# Altium PCB PCB3.PcbDoc
Units mm, origin at the board's own origin, x right, y up, seen from the top; angles counter-clockwise.
Board outline 86 x 64 mm, 2 copper layers (Top Layer, Bottom Layer); 14 components, 15 nets, 47 pads, 0 vias.
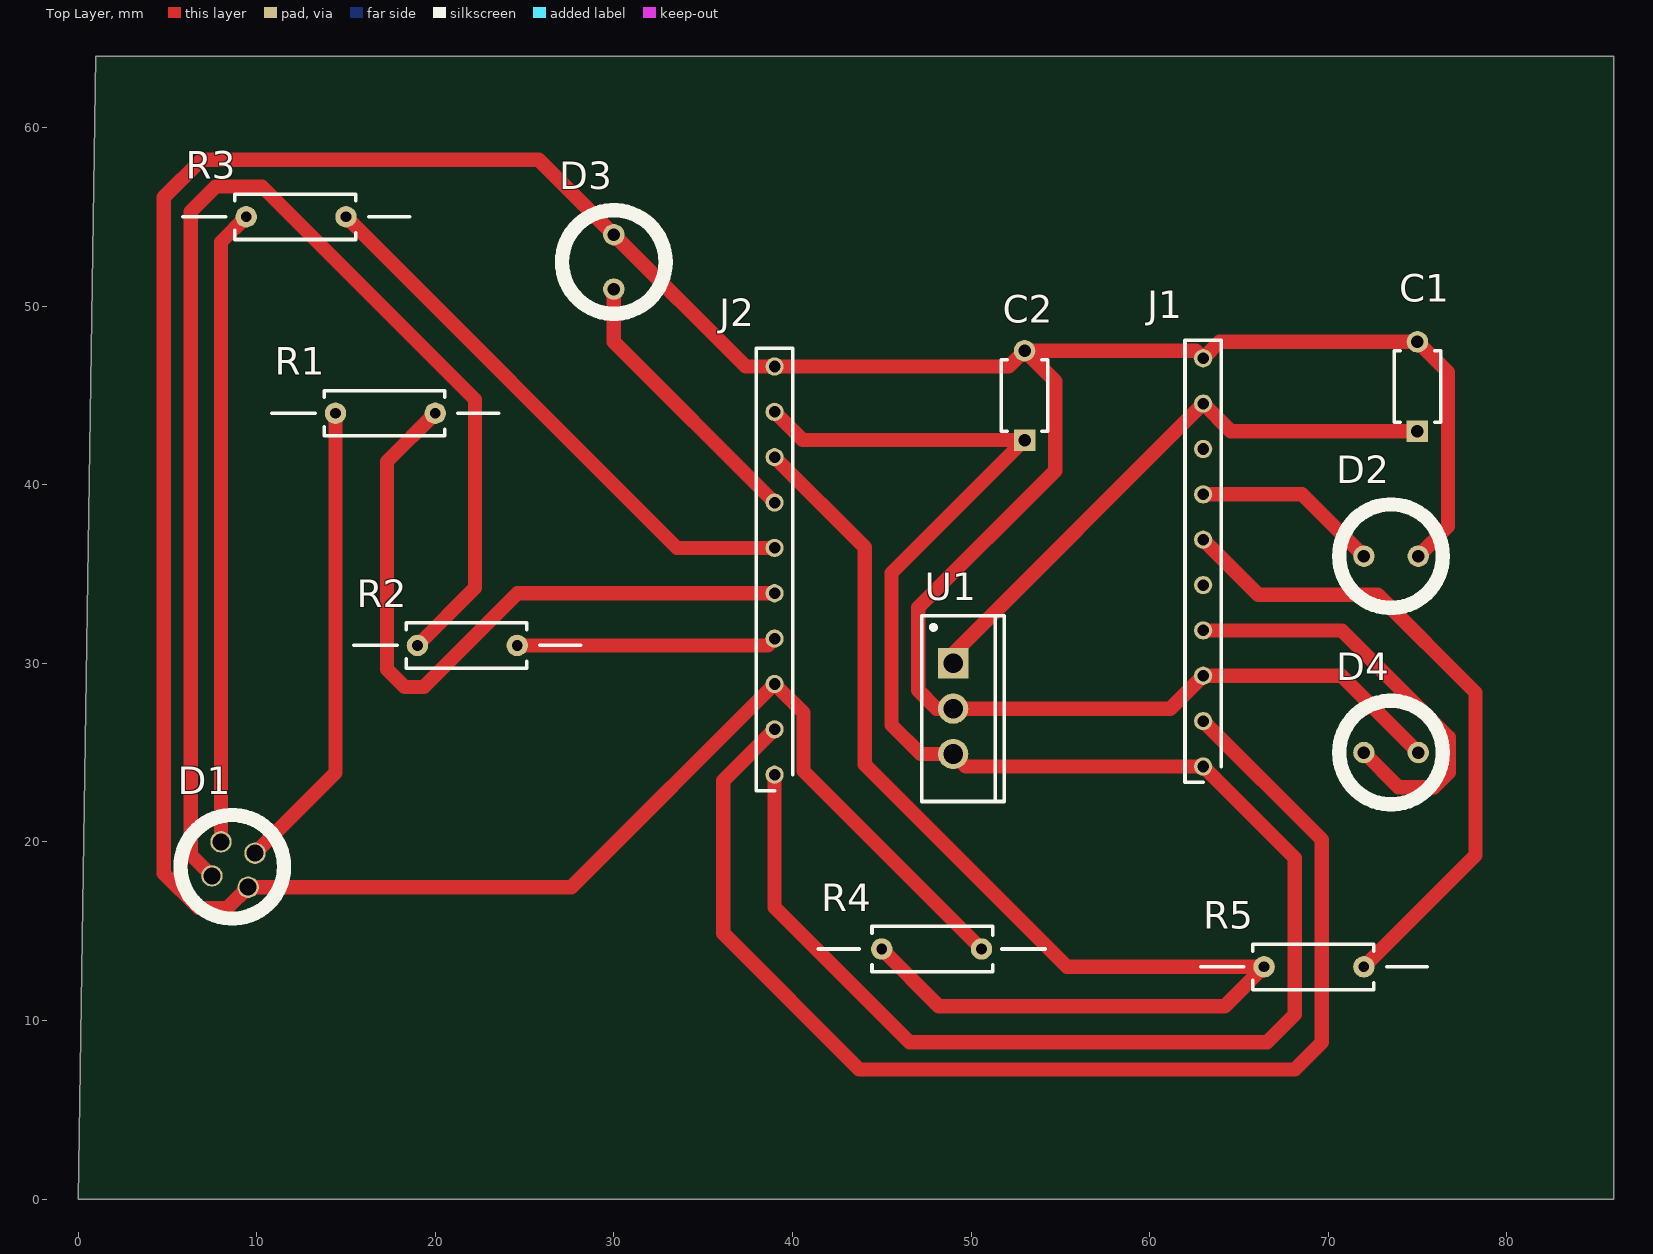
[diagram p0: Top Layer view]
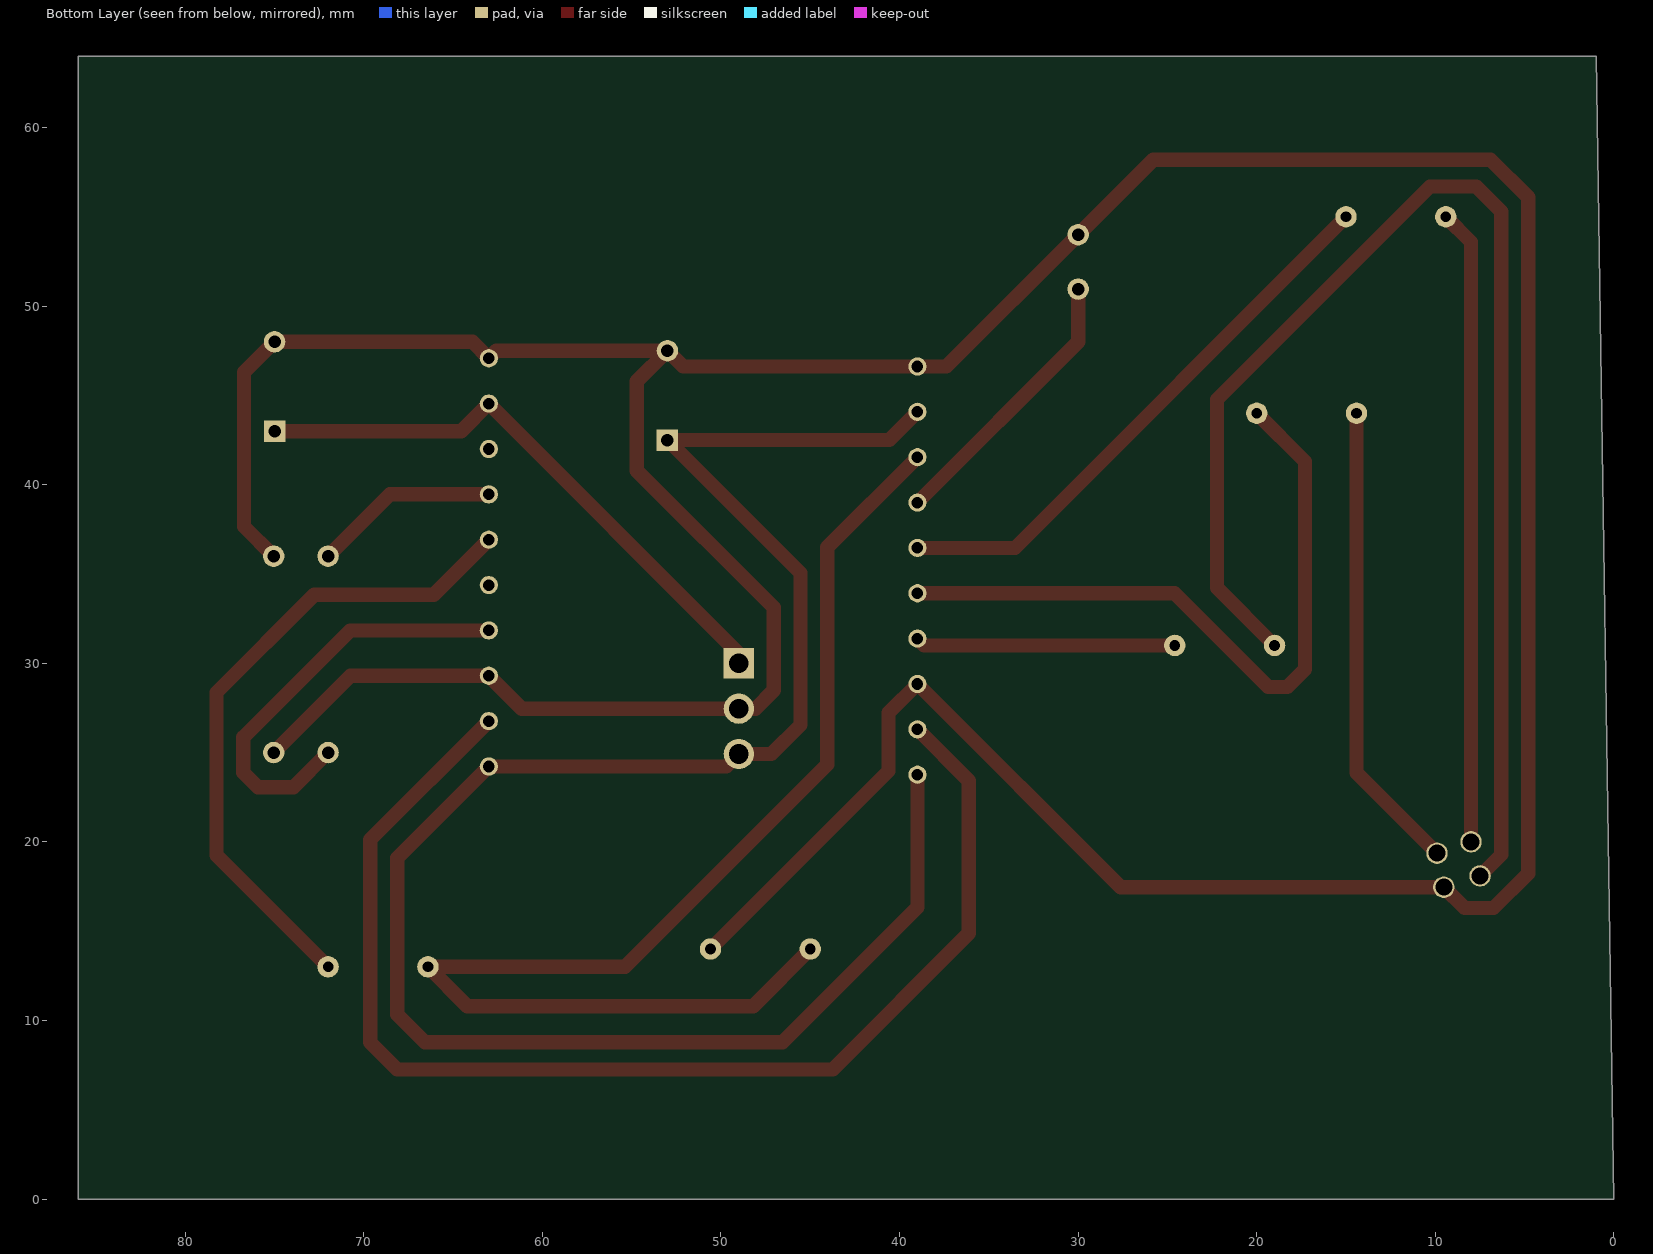
[diagram p1: Bottom Layer view, seen from below]

## Layer stack, top to bottom
Top Solder: solder mask 0.0102, Solder Resist, Dk 3.5
Top Layer: signal copper 0.0356
Dielectric 1: dielectric 0.32, FR-4, Dk 4.8
Bottom Layer: signal copper 0.0356
Bottom Solder: solder mask 0.0102, Solder Resist, Dk 3.5

## Board outline
1,64 86,64 86,0 0,0

## Design rules (kind name [scope] priority, off if disabled: settings)
Clearance [All] p1: gap=0.7 ignorepadtopadclearanceinfootprint=FALSE
HoleSize [IsPad] p1: absolutevalues=TRUE maxlimit=2.54 minlimit=0.2 maxpercent=80.000 minpercent=20.000
HoleToHoleClearance [All] p1: gap=0.3 allowstackedmicrovias=TRUE
PolygonConnect [All] p1: connectstyle=Relief reliefconductorwidth=0.254 reliefentries=4 polygonreliefangle="90 Angle" airgapwidth=0.254
RoutingLayers [All] p1: top layer_v5=TRUE bottom layer_v5=FALSE
RoutingVias [All] p1: holewidth=0.711 width=1.27 viastyle="Through Hole" minholewidth=0.711 minwidth=1.27 maxholewidth=0.711 maxwidth=1.27
SolderMaskExpansion [All] p1: expansion=0.102 istentingtop=FALSE
SupplyNets "Schematic Supply Nets_2" [InNet('Vin')] p1: voltage=0.000
SupplyNets "Schematic Supply Nets_1" [InNet('GND')] p2: voltage=0.000
SupplyNets "Schematic Supply Nets" [InNet('+5')] p3: voltage=0.000
Width [All] p1: maxlimit=1 minlimit=0.2 preferedwidth=0.8 minimp=50.000000 maximp=50.000000 favimp=50.000000
27 further rules are at their usual default settings.

## Components (designator, comment, footprint, x,y, rotation, side; value= is the part's Value field where it differs from the comment)
C1 "0.33uf" FP-K15H5-MFG 75,45.5 r90 top
C2 "0.1uf" FP-K15H5-MFG 53,45 r90 top
D1 "RGB" "RGB LED" 8,18.222 r0 top
D2 "Light-Emitting Diode" LED 71.619,36 r0 top
D3 "Light-Emitting Diode" LED 30,50.571 r90 top
D4 "Light-Emitting Diode" LED 71.619,25 r0 top
J1 "" pin_10 63,24.22 r90 top
J2 "10_PINS" pin_10 39,23.76 r90 top
R1 "Resistor" RESISTANCE 24.318,44 r180 top value="220 ohm"
R2 "Resistor" RESISTANCE 28.906,31 r180 top value="100 ohm"
R3 "Resistor" RESISTANCE 19.318,55 r180 top value="150 ohm"
R4 "Resistor" RESISTANCE 40.682,14 r0 top value="5 kohm"
R5 "Resistor" RESISTANCE 76.318,13 r180 top value="30 kohm"
U1 "L7805CV" TO220 49,27.46 r270 top

## Footprints (in the part's own frame and the unit in brackets; to place one, negate y for a bottom-side part, rotate by r counter-clockwise, add the part's x,y. Pads: shape width x height; smd on the part's side, far side on the other; paste and mask are expansions set on the pad)
FP-K15H5-MFG [mm]
  rect 1.2x1.2 hole 0.7 paste-2539.97 mask+0: 1(-2.5,0)
  round 1.2 hole 0.7 paste-2539.97 mask+0: 2(2.5,0)
  silkscreen extent -2,-1.3 2,1.3, body extent -3.2,-1.4 3.2,1.4, height 0.25
LED [mm]
  round 1.2 hole 0.7: 1(0.381,0) 2(3.429,0)
  silkscreen extent -1,-2.9 4.8,2.9
pin_10 [mm]
  round 1.02 / inner round 1.575 / far side round 1.02 hole 0.65: 1(0,0) 2(2.54,0) 3(5.08,0)
  round 1.02 hole 0.65: 4(7.62,0) 5(10.16,0) 6(12.7,0) 7(15.24,0) 8(17.78,0) 9(20.32,0) 10(22.86,0)
  silkscreen extent -0.89,-1.02 23.88,1.02
RESISTANCE [mm]
  round 1.2 hole 0.6: 1(4.318,0) 2(9.906,0)
  silkscreen extent 0.76,-1.27 13.46,1.27
"RGB LED" [mm]
  round 1.2 hole 0.95: 1(0,1.778) 2(1.905,1.143) 3(-0.508,-0.127) 4(1.524,-0.762)
  silkscreen extent -2.26,-2.52 3.53,3.28
TO220 [mm] "TO, Thru-Hole, Vertical, Heatsink Mounted; 3 In-Line Leads; Pitch 2.54 mm"
  rect 1.7x1.7 hole 1.1: 1(-2.54,0)
  round 1.7 hole 1.1: 2(0,0) 3(2.54,0)
  silkscreen extent -5.2,-1.75 5.2,2.85, body extent -5.25,-1.8 5.25,2.9, height 19.7

## Part data
C1 C2: library part CMP-02417-000078-1, "CAP CER 0.1UF 50V X7R RADIAL", Capacitance=100nF, Case/Package=Dipped, Dielectric=X7R, Dielectric Material=Ceramic, Max Operating Temperature=125°C, Min Operating Temperature=-55°C, Package Quantity=1, Tolerance=10%, Voltage=50V, Construction=RADIAL, Depth=2.5mm, Diameter=500um, Height=4mm, Height - Seated (Max)=0.257inch, Lead Diameter=0.5mm, Lead Free="Lead Free", Lead Length=30mm, Lead Pitch=5mm, Lead/Base Style="Formed Leads", Length=4mm, Mount="Through Hole", Packaging="Tape and Reel", Radiation Hardening=No, RoHS Compliant=Yes, Series=K, Termination=Radial, Thickness=2.6mm, Voltage Rating=50V, Voltage Rating (DC)=50V, Weight=0.005644oz, Width=2.5mm
D2 D3 D4: library part LED, AF=1, BV=0, BV_MAX=1e99, CJO=0, CJP=0, CTA=0, CTP=0, EG=1.11, FC=0.5, FCS=0.5, FV_MAX=1e99, IBV=0.001, IKF=0, IKR=0, IS=1e-14, ISR=1e-14, JSW=0, JTUN=0, JTUNSW=0, KEG=1, KF=0, LEVEL=1, MJSW=0.33, N=1, NBV=1, NR=1, NS=1, NTUN=30, PHP=1, RS=0, SimulationGenericComponent=True, TCV=0, TLEV=0, TLEVC=0, TM1=0, TM2=0, TNOM=27, TPB=0, TPHP=0, TRS=0, TRS2=0, TT=0, TTT1=0, TTT2=0, VJ=1, XTI=3, XTITUN=3
U1: library part CMP-0244-00483-1, "Positive Voltage Regulator, 5V, 3-Pin TO-220", ComponentLink1Description="Manufacturer URL", ComponentLink1URL=http://www.st.com, ComponentLink2Description=Datasheet, ComponentLink2URL=http://www.st.com/internet/com/TECHNICAL_RESOURCES/TECHNICAL_LITERATURE/DATASHEET/CD00000444.pdf, ComponentLink3Description="Package Specification", ComponentLink3URL=http://www.st.com/internet/com/TECHNICAL_RESOURCES/TECHNICAL_LITERATURE/PACKAGE_INFORMATION/CD00004649.pdf, DatasheetVersion=16/11/2011, PackageDescription="TO, Thru-Hole, Vertical, Heatsink Mounted; 3 In-Line Leads; Pitch 2.54 mm", PackageReference=TO220, PackageVersion=ver3.0
R1 R2 R3 R4 R5: SimulationGenericComponent=True, TC1=0, TC2=0

## Nets (pads, with @x,y where several pads share a name; then routed paths per layer and width w, separated by ;. In a path a pad name is that pad's centre, name@x,y a point inside that pad or via, vN(x,y) a via of type N, cw(c..) or ccw(c..) an arc to the next point about the centre after c; other vN are vias at no path point)
+5: C2.1 J1.1 J2.1 J2.9 U1.3 | length 108.4
  Top Layer w0.8: J2.1 39,16.341 46.559,8.781 66.575,8.781 68.124,10.331 68.124,19.096 J1.1 49.7,24.22 U1.3 47.18,24.92 45.55,26.55 45.55,35.05 C2.1 40.58,42.5 J2.9
GND: C1.2 C2.2 D1.4 D2.2 D3.2 D4.2 J1.3 J1.10 J2.3 J2.10 R4.2 U1.2 | length 241.8
  Top Layer w0.8: R4.2 40.616,23.972 40.616,27.224 J2.3 27.62,17.46 D1.4 8.355,16.291 6.739,16.291 4.8,18.23 4.8,56.09 6.91,58.2 25.8,58.2 D3.2 37.38,46.62 J2.10 52.12,46.62 C2.2 ; D4.2 70.748,29.3 J1.3 61.16,27.46 U1.2 48.074,27.46 47.05,28.484 47.05,33.122 54.713,40.785 54.713,45.787 C2.2 ; D2.2 76.709,37.661 76.709,46.291 C1.2 63.92,48 J1.10 62.58,47.5 C2.2
NetD1_1: D1.1 R3.2 | length 35.6
  Top Layer w0.8: D1.1 8,53.588 R3.2
NetD1_2: D1.2 R1.2 | length 26.5
  Top Layer w0.8: D1.2 14.412,23.872 R1.2
NetD1_3: D1.3 R2.2 | length 74.2
  Top Layer w0.8: D1.3 6.3,19.287 6.3,55.288 7.712,56.7 10.299,56.7 22.226,44.773 22.226,34.226 R2.2
NetD2_1: D2.1 J1.7 | length 10.4
  Top Layer w0.8: J1.7 68.54,39.46 D2.1
NetD3_1: D3.1 J2.7 | length 15.7
  Top Layer w0.8: D3.1 30,48 J2.7
NetD4_1: D4.1 J1.4 | length 24.1
  Top Layer w0.8: J1.4 70.758,31.84 76.748,25.85 76.748,23.882 75.922,23.056 73.944,23.056 D4.1
NetJ1_2: J1.2 J2.2 | length 70.7
  Top Layer w0.8: J2.2 36.12,23.42 36.12,14.877 43.74,7.257 68.124,7.257 69.648,8.781 69.648,20.112 J1.2
NetJ1_6: J1.6 R5.1 | length 36.7
  Top Layer w0.8: J1.6 66.083,33.837 72.773,33.837 78.248,28.362 78.248,19.248 R5.1
NetJ2_4: J2.4 R2.1 | length 14.6
  Top Layer w0.8: R2.1 38.62,31 J2.4
NetJ2_5: J2.5 R1.1 | length 39.7
  Top Layer w0.8: R1.1 17.299,41.299 17.299,29.66 18.289,28.669 19.356,28.669 24.607,33.92 J2.5
NetJ2_6: J2.6 R3.1 | length 31.7
  Top Layer w0.8: R3.1 33.54,36.46 J2.6
NetJ2_8: J2.8 R4.1 R5.2 | length 70
  Top Layer w0.8: J2.8 44.045,36.495 44.045,24.326 55.371,13 R5.2 64.212,10.8 48.2,10.8 R4.1
Vin: C1.1 J1.9 U1.1 | length 33
  Top Layer w0.8: U1.1 49,30.54 J1.9 64.54,43 C1.1
pads on no net: J1.5 J1.8